# EAGLE board concept (EAGLE 6.4)

Size 100.28 x 42.95 mm. Coordinates in mm from the lower left corner, seen from the top.
Outline: 100.28,38.28 100.28,0 0,0 0,42.95 100.28,42.95 100.28,38.3
Copper layers (1*16): Top 0.035mm / dielectric 1.5mm / Bottom 0.035mm
Design rules "default": minimum track width 10mil, minimum drill 24mil, track to track 8mil, track to pad 8mil, pad to pad 8mil, via to via 8mil, smd to smd 8mil, copper to edge 40mil, drill to drill 8mil, minimum pad ring 10mil, minimum via ring 8mil, stop-mask expansion 4mil, vias tented up to drill 0mil, thermal gap 10mil

## Footprints (pad centres in the part's own frame; a part is rotated, then mirrored left to right if it is on the bottom)
POWER_JACK_PTH_LOCK = drill 2.997 pad 4.115: GND 0.025,6.557; GNDBREAK 3.762,10.7 | drill 3.2 pad 4.115: PWR 0,13.878
QFN28ET = smd 1.15 x 0.3: 1 -2.4,1.5; 2 -2.4,1; 3 -2.4,0.5; 4 -2.4,0; 5 -2.4,-0.5; 6 -2.4,-1; 7 -2.4,-1.5; 15 2.4,-1.5; 16 2.4,-1; 17 2.4,-0.5; 18 2.4,0; 19 2.4,0.5; 20 2.4,1; 21 2.4,1.5 | smd 0.3 x 1.15: 8 -1.5,-2.4; 9 -1,-2.4; 10 -0.5,-2.4; 11 0,-2.4; 12 0.5,-2.4; 13 1,-2.4; 14 1.5,-2.4; 22 1.5,2.4; 23 1,2.4; 24 0.5,2.4; 25 0,2.4; 26 -0.5,2.4; 27 -1,2.4; 28 -1.5,2.4 | smd 3.15 x 3.15: EXP 0,0
C0805K = smd 1.3 x 1.6: 1 -1,0; 2 1,0
0402-RES = smd 0.7 x 0.9: 1 -0.65,0; 2 0.65,0
C1310 = smd 1 x 1.3: 1 -0.7,0; 2 0.7,0
DFN10-3X3 = smd 0.25 x 0.45: 1 -1,-1.35; 2 -0.5,-1.35; 3 0,-1.35; 4 0.5,-1.35; 5 1,-1.35; 6 1,1.35; 7 0.5,1.35; 8 0,1.35; 9 -0.5,1.35; 10 -1,1.35 | smd 2.38 x 1.65: EXP 0,0
1210 = smd 1.2 x 2: 1 -1.6,0; 2 1.6,0
FIDUCIAL-1X2 = smd 1 x 1: 1 0,0
SCREWTERMINAL-3.5MM-2 = drill 1.2 pad 2.032 square: 1 0,0 | drill 1.2 pad 2.032: 2 3.5,0
AUDIO-JACK-3.5MM-SMD = smd 2 x 2.5: RING 4.3,3.45; SLEEVE 2.5,-3.45; TIP 11.7,-3.45 | smd 1.2 x 2.5: RSH 1.5,3.45 | smd 2.5 x 2: TSH 15.75,0.75 | hole 2: 3.5,0; 10.5,0
USB-MICROB = smd 0.35 x 1.4: D+ 0,2.65; D- -0.65,2.65; GND 1.3,2.65; ID 0.65,2.65; VBUS -1.3,2.65 | smd 1.8 x 1.9: MT1 -4,0; MT2 4,0 | smd 1.9 x 1.9: P$1 -1.27,0; P$2 1.27,0
CDRH2D09 = smd 1.3 x 1.3: P$1 -1.5,0; P$2 1.5,0

## Placement (x,y rotation side)
BARREL1  [POWER_JACK_PTH_LOCK]  74.5,42.82 180 top
BARREL2  [POWER_JACK_PTH_LOCK]  83.52,42.75 180 top
DSPIC  [QFN28ET]  34.26,17.55 0 top
E$6  [C0805K]  18.77,34.47 0 top
E$7  [C0805K]  22.2,34.47 0 top
E$8  [0402-RES]  17.63,30.07 90 top
E$9  [0402-RES]  21.39,29.62 180 top
E$10  [C1310]  29.03,31.67 90 top
E$11  [C1310]  31.06,31.67 90 top
E$12  [DFN10-3X3]  20.5,31.9 90 top
E$13  [0402-RES]  21.36,28.45 180 top
E$14  [0402-RES]  26.21,30.4 180 top
E$15  [0402-RES]  25.55,28.32 270 top
E$16  [1210]  45.29,18.19 0 top
E$21  [C1310]  61.62,31.9 90 top
E$22  [C1310]  63.65,31.9 90 top
E$23  [DFN10-3X3]  53.09,32.13 90 top
E$25  [C0805K]  51.36,34.7 0 top
E$26  [C0805K]  54.79,34.7 0 top
E$27  [0402-RES]  50.22,30.3 90 top
E$28  [0402-RES]  53.98,29.84 180 top
E$29  [0402-RES]  53.95,28.68 180 top
E$30  [0402-RES]  58.8,30.63 180 top
E$31  [0402-RES]  58.14,28.55 270 top
E$32  [FIDUCIAL-1X2]  1.42,41.63 0 top
E$33  [FIDUCIAL-1X2]  1.65,1.42 0 top
E$34  [FIDUCIAL-1X2]  98.35,1.45 0 top
E$35  [OSHW-LOGO-L]  74.17,8.1 0 top
HIGH_CURRENT1  [SCREWTERMINAL-3.5MM-2]  96.19,32.31 90 top
HIGH_CURRENT2  [SCREWTERMINAL-3.5MM-2]  96.22,25.15 90 top
IN  [AUDIO-JACK-3.5MM-SMD]  1.88,8.74 0 top
IN_USB  [USB-MICROB]  1.88,33.32 270 top
LTC3605_5V_3.3V  [CDRH2D09]  25.35,32.46 0 top
OUT  [AUDIO-JACK-3.5MM-SMD]  98.4,8.92 180 top
PLACEHOLDER  [CDRH2D09]  57.94,32.69 0 top

## Library data of the parts
BARREL1 BARREL2 HIGH_CURRENT1 HIGH_CURRENT2 IN IN_USB OUT = SparkFun-Connectors
DSPIC = allegro
E$6 E$7 E$25 E$26 = ref-packages
E$8 E$9 E$13-E$15 E$27-E$31 = SparkFun-Resistors
E$10 E$11 E$21 E$22 = eagle-ltspice
E$12 E$23 = linear-technology
E$16 = SparkFun-Capacitors
E$32-E$35 = SparkFun-Aesthetics
LTC3605_5V_3.3V PLACEHOLDER = SparkFun-Passives

## Text on the board
Dimension: 5V to 3.3V ps for DSP processor / 12V to 5V ps for high current output / High-current ps is enabled by not gate at fuse (not placed)